# EAGLE board PCB PANEL USB2MCV V1 (EAGLE 6.1)
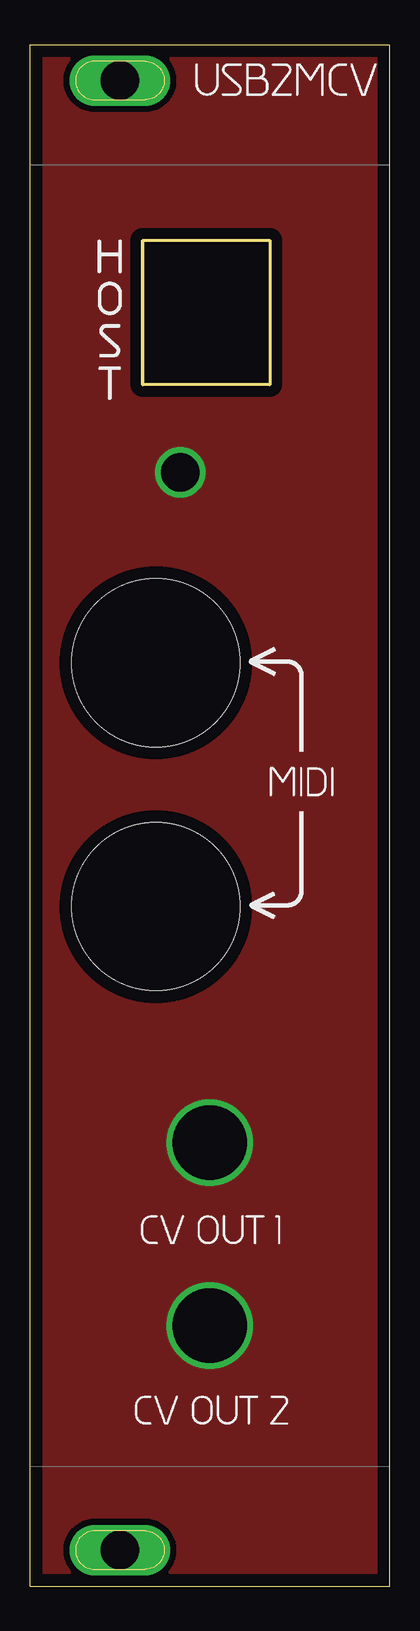
[diagram p0: board, top side]
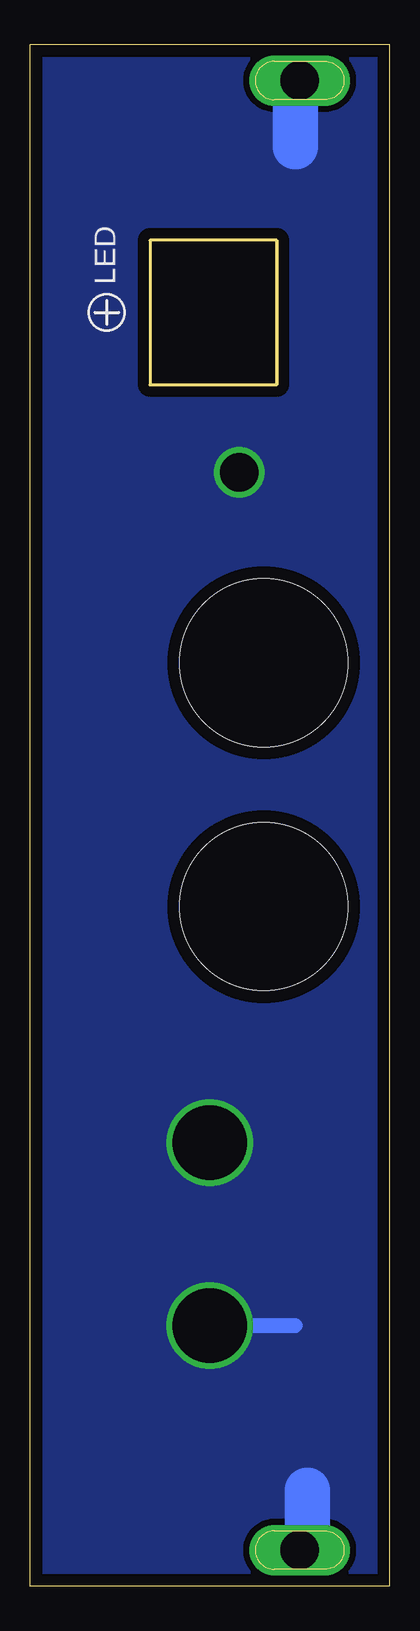
[diagram p1: board, bottom side, seen from below]

Size 30 x 128.5 mm. Coordinates in mm from the lower left corner, seen from the top.
Outline: 20,112.19 9.4,112.19 9.4,100.15 20,100.15 20,112.19
Copper layers (1*16): Top 0.035mm / dielectric 1.5mm / Bottom 0.035mm
Design rules: minimum track width 10mil, minimum drill 24mil, track to track 8mil, track to pad 8mil, pad to pad 8mil, via to via 8mil, smd to smd 8mil, copper to edge 40mil, drill to drill 8mil, minimum pad ring 10mil, minimum via ring 8mil, stop-mask expansion 4mil, vias tented up to drill 0mil, thermal gap 10mil
Holes 14 mm at 10.5,76.96 10.5,56.64
Milling: area 9.4,100.2 to 20,112.2; 2 lines

## Footprints (pad centres in the part's own frame; a part is rotated, then mirrored left to right if it is on the bottom)
MOUNTING_HOLE-3.2 = drill 3.2 long: GND 0,0

## Placement (x,y rotation side)
ARTWORK  [LABEL_USB2MCV_ARTWORK]  0,0 0 top
PANEL_OUTLINE  [6HP_PANEL]  0,0 0 top
U$1  MOUNTING_SLOT  [MOUNTING_HOLE-3.2]  7.5,3 0 top
U$2  MOUNTING_SLOT  [MOUNTING_HOLE-3.2]  7.5,125.5 0 top

## Library data of the parts
ARTWORK = labels links
PANEL_OUTLINE U$1 U$2 = EURORACK PANELS

## Nets
GND: U$1.GND U$2.GND

## Tracks (layer width: path | path; a pad name or v marks a point on that pad's centre or on a via)
GND  (via drill 3.2, 6.2)
  Bottom 1.27: U$1.GND 7.86,3 | v15,21.72 7.86,21.72
  Bottom 3.81: 7.86,3 6.86,3 6.86,8 | U$2.GND 7.86,125.5 7.86,120
  other vias: 12.55,92.84 15,36.96
  pour Bottom (no thermals): -1.14,130 -1.14,-2 31.36,-2 31.36,130
  pour Top (no thermals): -1.14,130 -1.14,-2 31.36,-2 31.36,130

## Text on the board
bNames: LED